# Altium PCB LineDetector.PcbDoc
Units mm, origin at the board's own origin, x right, y up, seen from the top; angles counter-clockwise.
Board outline 37 x 50 mm, 2 copper layers (Top Layer, Bottom Layer); 43 components, 24 nets, 141 pads, 30 vias.
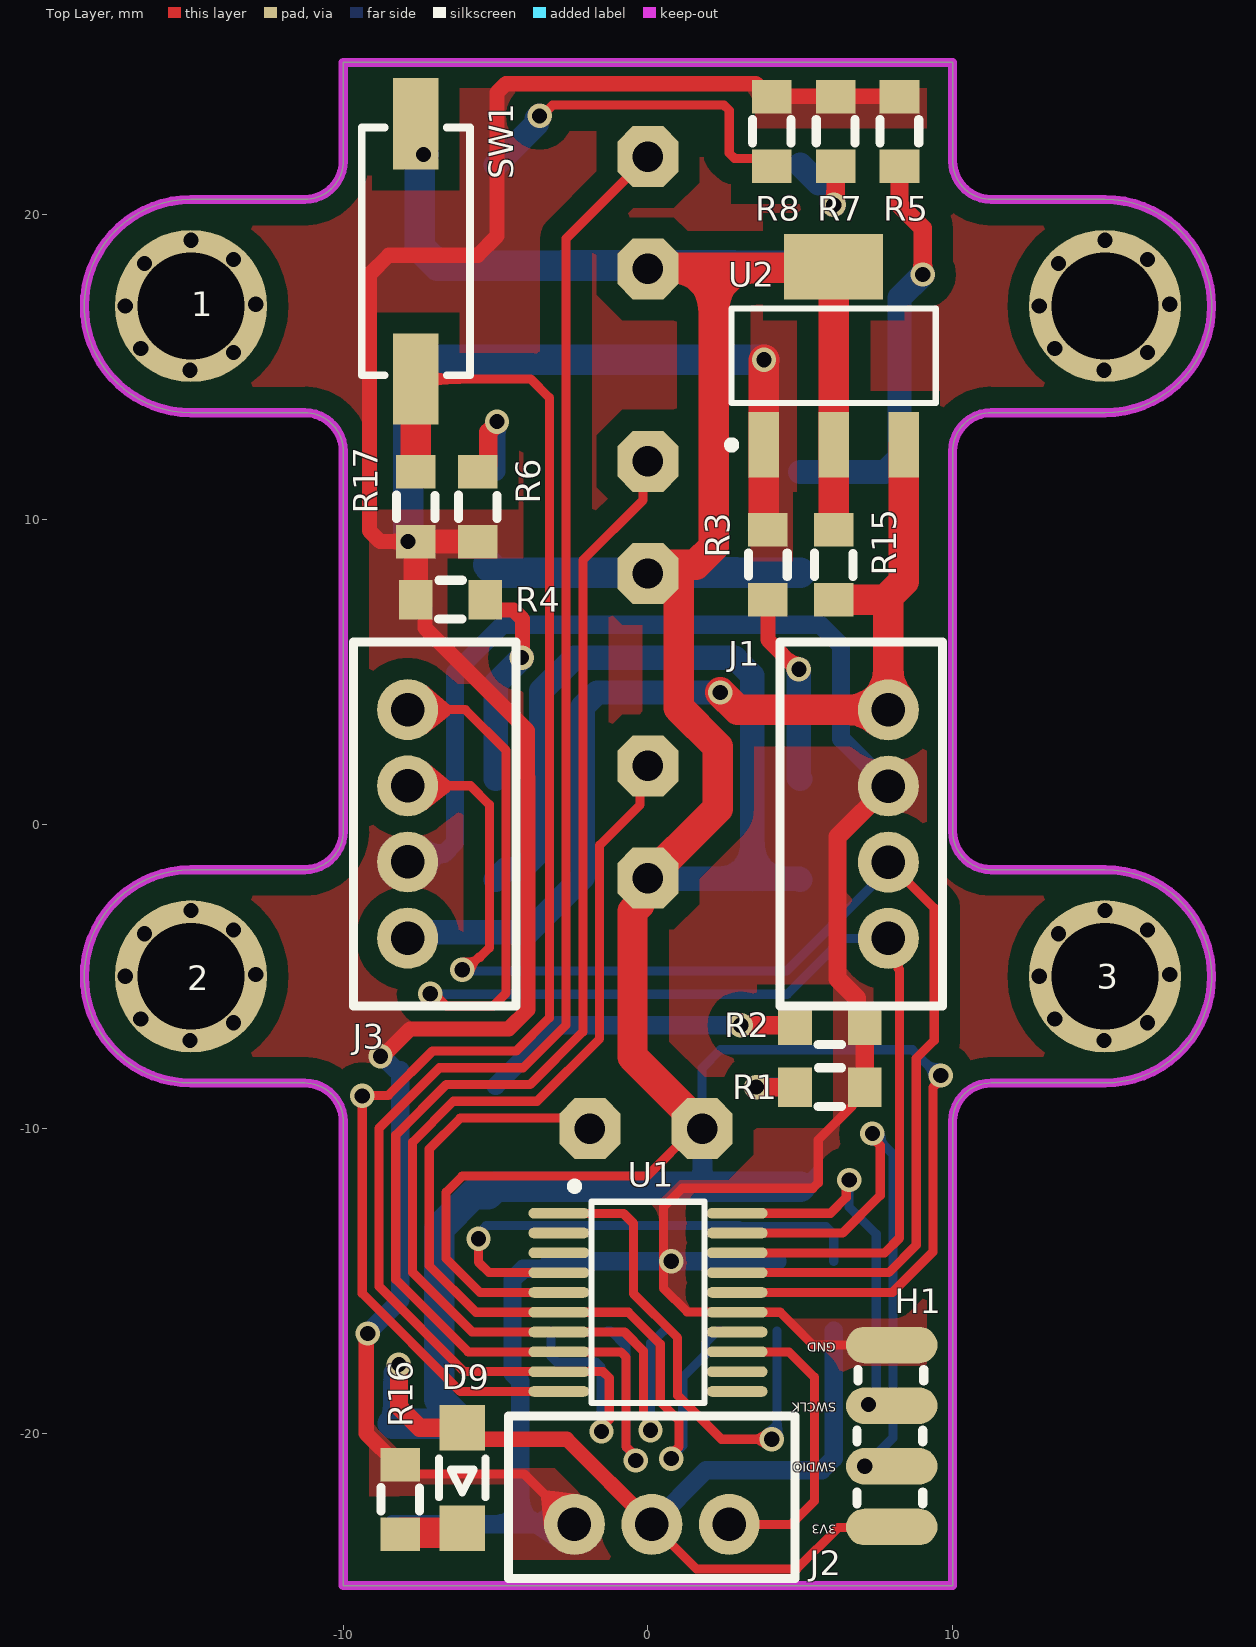
[diagram p0: Top Layer view]
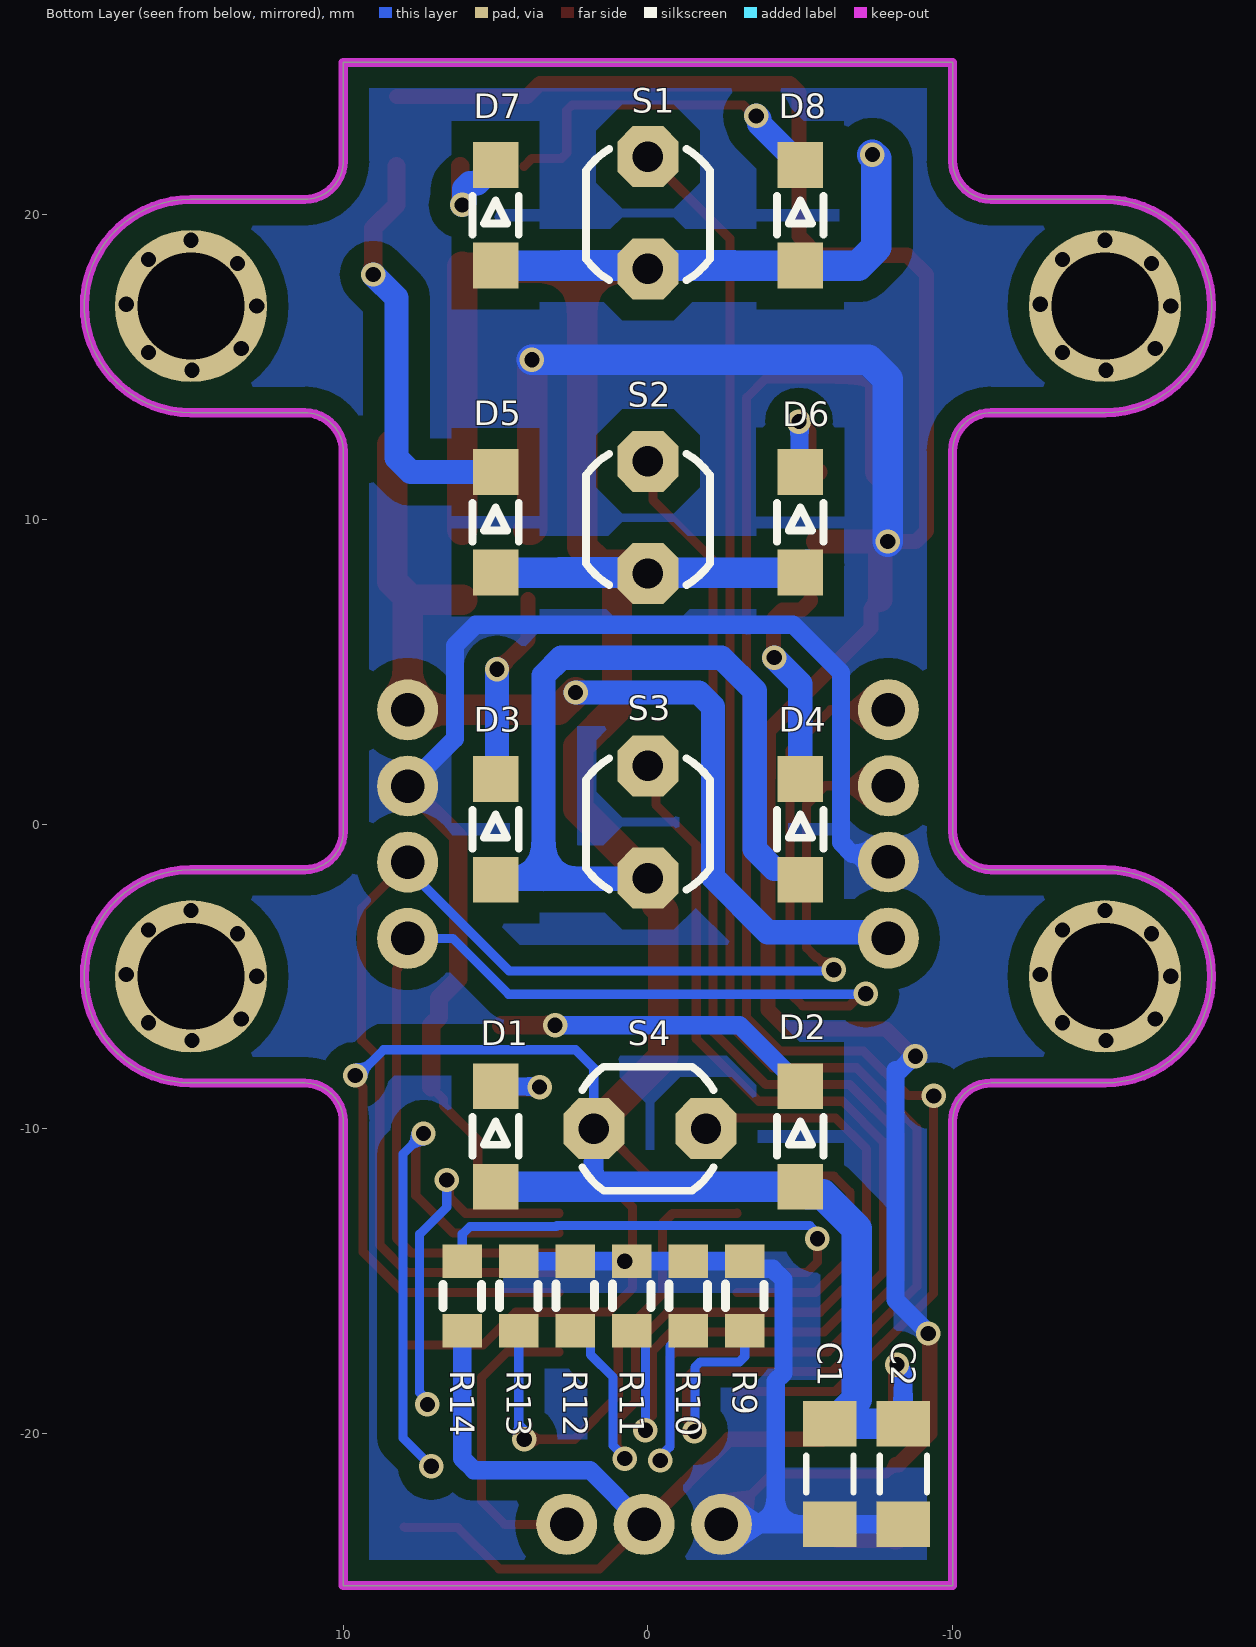
[diagram p1: Bottom Layer view, seen from below]
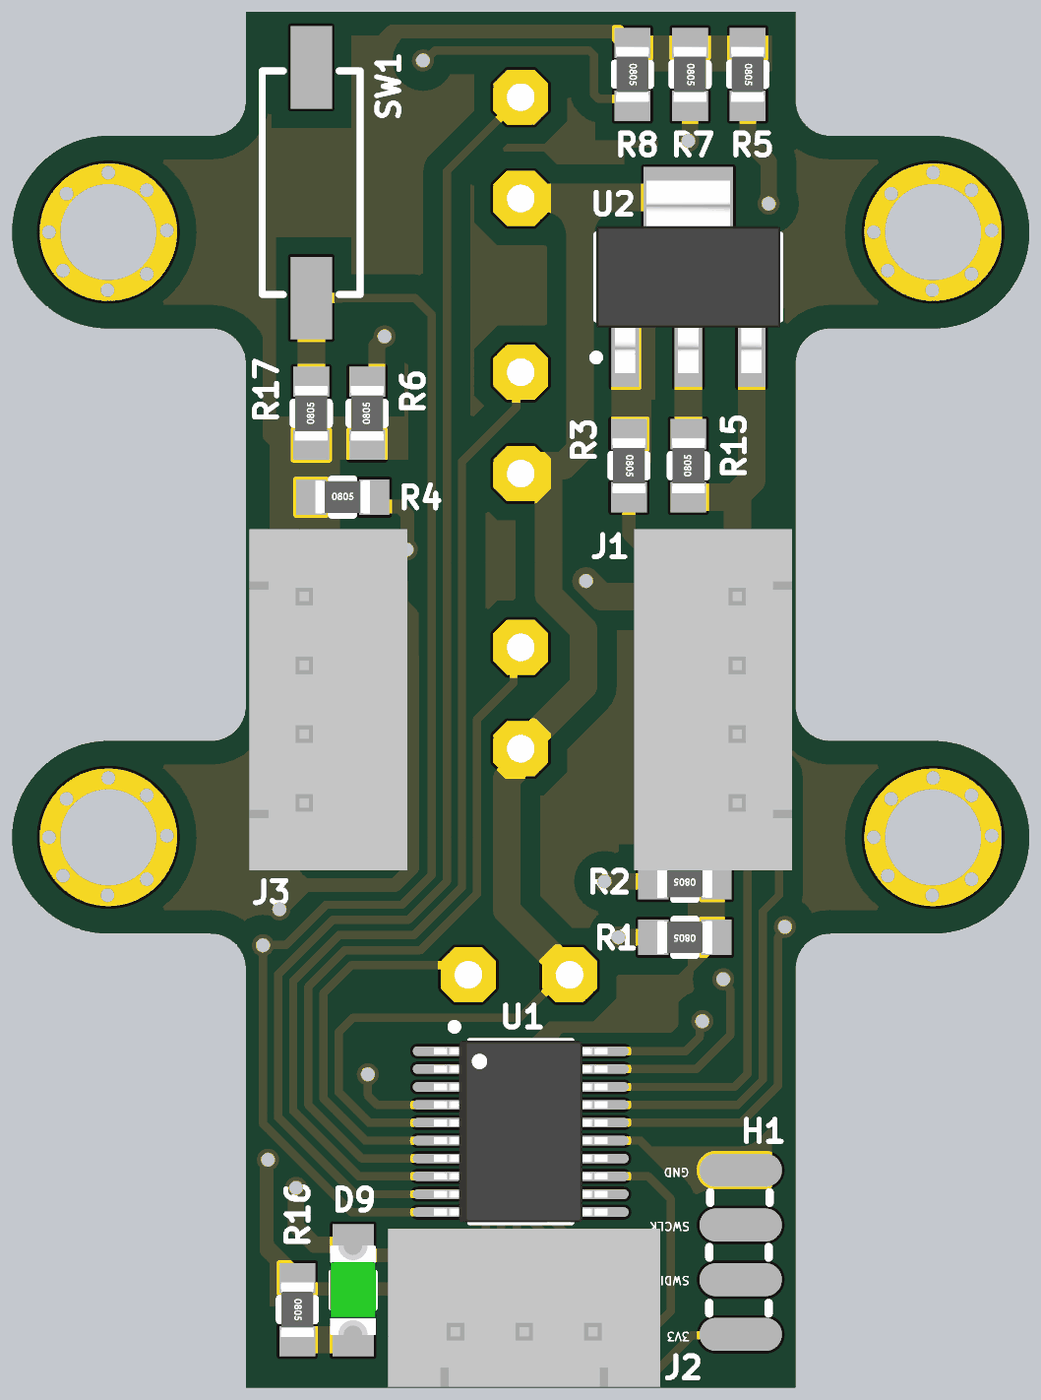
[diagram p2: 3D render of the assembled board from above, using the file's embedded part models]
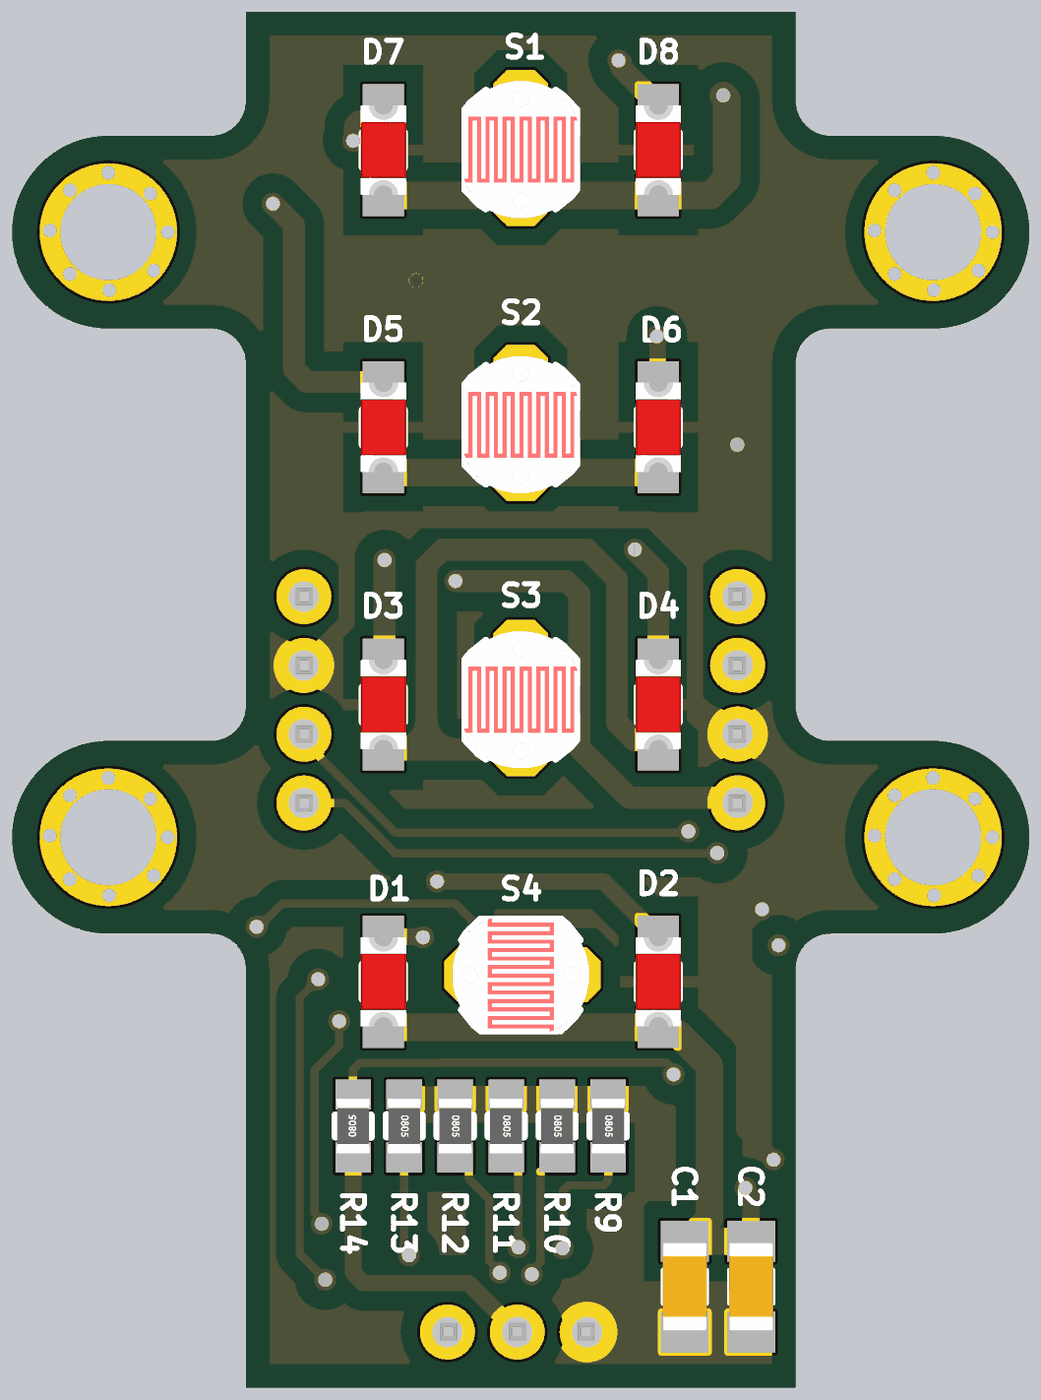
[diagram p3: 3D render of the assembled board from below, using the file's embedded part models]

## Layer stack, top to bottom
Top Solder: solder mask 0.0102, Solder Resist, Dk 3.5
Top Layer: signal copper 0.0356
Dielectric 1: dielectric 0.32, FR-4, Dk 4.8
Bottom Layer: signal copper 0.0356
Bottom Solder: solder mask 0.0102, Solder Resist, Dk 3.5

## Board outline
-15,-8.5 -11.27,-8.5 cw(c-11.27,-9.77) -10,-9.77 -10,-25 10,-25 10,-9.77 cw(c11.27,-9.77) 11.27,-8.5 15,-8.5 ccw(c15,-5) 15,-1.5 11.27,-1.5 cw(c11.27,-0.23) 10,-0.23 10,12.23 cw(c11.27,12.23) 11.27,13.5 15,13.5 ccw(c15,17) 15,20.5 11.27,20.5 cw(c11.27,21.77) 10,21.77 10,25 -10,25 -10,21.77 cw(c-11.27,21.77) -11.27,20.5 -15,20.5 ccw(c-15,17) -15,13.5 -11.27,13.5 cw(c-11.27,12.23) -10,12.23 -10,-0.23 cw(c-11.27,-0.23) -11.27,-1.5 -15,-1.5 ccw(c-15,-5)

## Design rules (kind name [scope] priority, off if disabled: settings)
Clearance [All] p1: gap=0.7 ignorepadtopadclearanceinfootprint=FALSE except(0: Arc-Hole Track-Hole SMDPad-Hole THPad-Hole Via-Hole Fill-Hole Poly-Hole Region-Hole Text-Hole; 0.25: Arc-Arc Arc-Track Arc-SMDPad Track-Track Track-SMDPad SMDPad-SMDPad; 0.254: Arc-THPad Arc-Via Arc-Text Track-THPad Track-Via Track-Text SMDPad-THPad SMDPad-Via SMDPad-Text THPad-THPad THPad-Via THPad-Text Via-Via Via-Text Fill-Text Poly-Text Region-Text Text-Text)
ComponentClearance [All] p1 off: gap=0.254 collisioncheckmode=3 verticalgap=0.254 showdistances=FALSE
Height [All] p1 off: minheight=0 maxheight=25.4 prefheight=12.7
PlaneConnect [All] p1: planeconnectstyle=Direct reliefexpansion=0.508 reliefentries=4 reliefconductorwidth=0.254 reliefairgap=0.254
PolygonConnect [All] p1: connectstyle=Direct reliefconductorwidth=0.254 reliefentries=4 polygonreliefangle="90 Angle" airgapwidth=0.254
RoutingVias [All] p1: holewidth=0.5 width=0.8 viastyle="Through Hole" minholewidth=0.5 minwidth=0.5 maxholewidth=0.5 maxwidth=1
SolderMaskExpansion [All] p1: expansion=0.102 istentingtop=FALSE
Width [All] p1: maxlimit=5 minlimit=0.25 preferedwidth=1
27 further rules are at their usual default settings.

## Classes and differential pairs
component class LineDetector: C1 C2 D1 D2 D3 D4 D5 D6 D7 D8 D9 H1 J1 J2 J3 R1 R2 R3 R4 R5 R6 R7 R8 R9 R10 R11 R12 R13 R14 R15 R16 R17 S1 S2 S3 S4 SW1 U1 U2

## Components (designator, comment, footprint, x,y, rotation, side; value= is the part's Value field where it differs from the comment)
1 "Comment" SCREW -15,17 r0 top locked
2 "Comment" SCREW -15,-5 r0 top
3 "Comment" SCREW 15,-5 r0 top
C1 "CAP" CAP1206 -5.969,-21.336 r90 bottom
C2 "CAP" CAP1206 -8.382,-21.336 r90 bottom
D1 "LED" "LED RED 1206" 5,-10.254 r90 bottom locked
D2 "LED" "LED RED 1206" -5,-10.254 r90 bottom locked
D3 "LED" "LED RED 1206" 5,-0.176 r90 bottom locked
D4 "LED" "LED RED 1206" -5,-0.176 r90 bottom locked
D5 "LED" "LED RED 1206" 5,9.903 r90 bottom locked
D6 "LED" "LED RED 1206" -5,9.903 r90 bottom locked
D7 "LED" "LED RED 1206" 5,19.981 r90 bottom locked
D8 "LED" "LED RED 1206" -5,19.981 r90 bottom locked
D9 "LED" "LED GREEN 1206" -6.096,-21.463 r270 top
H1 "PROG" PROGRAMER 8.001,-20.024 r90 top
J1 "XH4" "XH 4PIN" 7,0 r90 top locked
J2 "XH3" "XH 3PIN" 0.127,-22.098 r0 top
J3 "XH4" "XH 4PIN" -7,0 r270 top locked
R1 "RES" RES805 5.969,-8.636 r180 top
R2 "RES" RES805 5.969,-6.604 r180 top
R3 "RES" RES805 3.937,8.509 r270 top
R4 "RES" RES805 -6.477,7.366 r0 top
R5 "RES" RES805 8.255,22.733 r270 top
R6 "RES" RES805 -5.588,10.414 r90 top
R7 "RES" RES805 6.159,22.733 r270 top
R8 "RES" RES805 4.064,22.733 r270 top
R9 "RES" RES805 -3.179,-15.494 r270 bottom
R10 "RES" RES805 -1.324,-15.494 r270 bottom
R11 "RES" RES805 0.531,-15.494 r270 bottom
R12 "RES" RES805 2.386,-15.494 r270 bottom
R13 "RES" RES805 4.241,-15.494 r270 bottom
R14 "RES" RES805 6.096,-15.494 r90 bottom
R15 "RES" RES805 6.096,8.509 r90 top
R16 "RES" RES805 -8.128,-22.171 r270 top
R17 "RES" RES805 -7.62,10.414 r90 top
S1 "LDR" LDR 0,20 r90 bottom locked
S2 "LDR" LDR 0,10 r90 bottom locked
S3 "LDR" LDR 0,0 r90 bottom
S4 "LDR" LDR 0,-10 r180 bottom locked
SW1 "Switch" pushbutton -7.62,18.796 r270 top
U1 "STM32F030F4P6" STM32F030F4P6 0,-15.7 r0 top locked
U2 "1117" AMS1117 6.096,15.367 r90 top
? "Comment" SCREW 15,17 r0 top locked

## Footprints (in the part's own frame and the unit in brackets; to place one, negate y for a bottom-side part, rotate by r counter-clockwise, add the part's x,y. Pads: shape width x height; smd on the part's side, far side on the other; paste and mask are expansions set on the pad)
AMS1117 [mm] "SOT223, 4-Leads, Body 6.30x7.00mm (avg), Pitch 2.30mm, IPC Medium Density"
  rect 2.15x1 smd: 1(-2.925,2.3) 2(-2.925,0) 3(-2.925,-2.3)
  rect 2.15x3.25 smd: 4(2.925,0)
  silkscreen extent -3.05,-3.35 1.55,3.47, body extent -3.5,-3.35 3.5,3.35, height 1.65
CAP1206 [mm] "Chip Capacitor, 2-Leads, Body 3.20x1.60mm, IPC Medium Density"
  rect 1.5x1.75 smd: 1(-1.651,0) 2(1.651,0)
  silkscreen extent -0.6,-0.77 0.6,0.77, body extent -1.6,-0.8 1.6,0.8, height 1
LDR [mm]
  oct 2x2 hole 1: 1(-1.778,0) 2(1.905,0)
  silkscreen extent -2.15,-2.03 2.15,2.03, body extent -2.5,-2.15 2.5,2.15, height 2.9
"LED GREEN 1206" [mm]
  rect 1.5x1.5 smd: 1(-1.651,0) 2(1.651,0)
  silkscreen extent -0.64,-0.76 0.64,0.76, body extent -1.63,-0.83 1.64,0.82, height 0.9
"LED RED 1206" [mm]
  rect 1.5x1.5 smd: 1(-1.651,0) 2(1.651,0)
  silkscreen extent -0.64,-0.76 0.64,0.76, body extent -1.63,-0.83 1.64,0.82, height 0.9
PROGRAMER [mm]
  oval 1.2x3 smd: 1(-3.048,0) 2(-1.058,0) 3(0.931,0) 4(2.921,0)
  silkscreen extent -2.29,-1.05 2.12,1.14
pushbutton [mm]
  rect 3x1.5 smd: 1(-4.191,0) 2(4.191,0)
  silkscreen extent -4.06,-1.78 4.06,1.78, body extent -4.17,-1.82 4.17,1.82, height 4.25
RES805 [mm]
  rect 1.1x1.3 smd: 1(-1.143,0) 2(1.143,0)
  silkscreen extent -0.39,-0.64 0.38,0.64, body extent -1,-0.6 1,0.6, height 0.48
SCREW [mm]
  round 5 hole 3.5: 1(0,0)
  round 0 hole 0.5: ""(-2.159,0) ""(-1.651,-1.397) ""(-1.524,1.397) ""(-0.031,-2.11) ""(0,2.159) ""(1.397,-1.524) ""(1.397,1.524) ""(2.128,0.059)
STM32F030F4P6 [mm] "TSOP, 20-Leads, Body 6.50x4.40mm, Pitch 0.65mm, IPC Medium Density"
  oval 2x0.35 smd: 1(-2.925,2.925) 2(-2.925,2.275) 3(-2.925,1.625) 4(-2.925,0.975) 5(-2.925,0.325) 6(-2.925,-0.325) 7(-2.925,-0.975) 8(-2.925,-1.625) 9(-2.925,-2.275) 10(-2.925,-2.925) 11(2.925,-2.925) 12(2.925,-2.275) 13(2.925,-1.625) 14(2.925,-0.975) 15(2.925,-0.325) 16(2.925,0.325) 17(2.925,0.975) 18(2.925,1.625) 19(2.925,2.275) 20(2.925,2.925)
  silkscreen extent -2.54,-3.3 1.85,3.93, body extent -3.15,-3.3 3.15,3.3, height 1.2
"XH 3PIN" [mm]
  round 2 hole 1.1: 1(-2.54,-0.889) 2(0,-0.889) 3(2.54,-0.889)
  silkscreen extent -4.7,-2.67 4.7,2.67, body extent -4.95,-2.88 4.95,2.88, height 7
"XH 4PIN" [mm]
  round 2 hole 1.1: 1(-3.753,-0.889) 2(-1.253,-0.889) 3(1.247,-0.889) 4(3.747,-0.889)
  silkscreen extent -5.97,-2.67 5.97,2.67, body extent -6.2,-2.88 6.2,2.88, height 7

## Part data
C1 C2: library part CAP1206, "Capacitor SMD 1206"
D1 D2 D3 D4 D5 D6 D7 D8 D9: library part "LED SMD 1206", "LED SMD 1206"
H1: library part Programmer
J1 J3: library part "XH 4PIN", "XH Connector 4pins"
J2: library part "XH 3PIN", "XH Connector 3pins"
R1 R2 R3 R4 R5 R6 R7 R8 R9 R10 R11 R12 R13 R14 R15 R16 R17: library part RES805, "RESISTOR SMD"
S1 S2 S3 S4: "Light Emmiting Diode - photocell"
SW1: library part pushbutton, "Switch SMD Tact"
U2: library part AMS1117, "3.3v Regulator"

## Via types
v1: diameter 0.8, hole 0.5, Top Layer to Bottom Layer, tented both sides, 30 vias

## Nets (pads, with @x,y where several pads share a name; then routed paths per layer and width w, separated by ;. In a path a pad name is that pad's centre, name@x,y a point inside that pad or via, vN(x,y) a via of type N, cw(c..) or ccw(c..) an arc to the next point about the centre after c; other vN are vias at no path point)
+5: J1.4 J3.4 R15.1 U2.3 | length 33.4
  Top Layer w1: v1(2.375,4.318) 2.946,3.747 J1.4 7.889,7.459 ; R15.1 7.796,7.366 7.889,7.459 ; U2.3 8.396,7.966 7.889,7.459
  Bottom Layer w0.8: J3.4 -7.698,-3.555 -3.936,-3.555 -2.134,-1.753 -2.134,3.849 -1.666,4.318 v1(2.375,4.318)
ADC0: R12.2 S4.2 U1.6 | length 27.3
  Top Layer w0.3: S4.2 -2.253,-9.652 -6.16,-9.652 -7.177,-10.669 -7.177,-14.493 -5.645,-16.025 U1.6 -0.644,-16.025 0.404,-17.073 0.404,-18.962 1.016,-19.574 1.016,-20.439 0.762,-20.693 v1(0.762,-20.828)
  Bottom Layer w0.3: v1(0.762,-20.828) 0.762,-20.783 1.143,-20.402 1.143,-18.161 1.886,-17.418 1.886,-17.037 2.286,-16.637 R12.2
ADC1: R11.2 S3.2 U1.7 | length 36.3
  Top Layer w0.3: S3.2 -0.258,1.647 -0.258,0.631 -1.587,-0.698 -1.587,-6.286 -1.587,-7.048 -3.641,-9.102 -4.403,-9.102 -5.704,-9.102 -6.388,-9.102 -7.727,-10.441 -7.727,-14.721 -5.772,-16.675 U1.7 -0.771,-16.675 -0.146,-17.3 -0.146,-19.412 -0.011,-19.547 -0.011,-19.804 v1(0.085,-19.9)
  Bottom Layer w0.3: v1(0.085,-19.9) 0.085,-17.037 0.118,-17.037 0.518,-16.637 R11.2
ADC2: R10.2 S2.2 U1.8 | length 48.7
  Top Layer w0.3: v1(-0.404,-20.89) -0.404,-20.754 -0.719,-20.439 -0.719,-17.505 -0.899,-17.325 U1.8 -5.9,-17.325 -8.277,-14.949 -8.277,-10.213 -6.615,-8.552 -5.932,-8.552 -4.631,-8.552 -3.869,-8.552 -2.137,-6.82 -2.137,-6.058 -2.137,8.658 -0.164,10.631 -0.164,11.741 S2.2
  Bottom Layer w0.3: R10.2 -1.224,-16.637 -0.72,-17.141 -0.72,-20.438 -0.404,-20.754 v1(-0.404,-20.89)
ADC3: R9.2 S1.2 U1.9 | length 57.8
  Top Layer w0.3: v1(-1.524,-19.939) -1.524,-19.804 -1.269,-19.549 -1.269,-18.181 -1.475,-17.975 U1.9 -6.028,-17.975 -8.827,-15.176 -8.827,-9.985 -6.843,-8.002 -6.16,-8.002 -4.859,-8.002 -4.097,-8.002 -2.687,-6.592 -2.687,-5.83 -2.687,19.218 S1.2
  Bottom Layer w0.3: R9.2 -3.179,-17.477 -3.003,-17.653 -1.716,-17.653 -1.54,-17.829 -1.54,-19.923 v1(-1.524,-19.939)
BOOT0: R13.2 U1.1 | length 16.1
  Top Layer w0.3: U1.1 -2.915,-12.785 -0.804,-12.785 -0.476,-13.113 -0.476,-15.415 0.975,-16.866 0.975,-18.755 2.413,-20.193 v1(4.064,-20.193)
  Bottom Layer w0.3: v1(4.064,-20.193) 4.064,-20.058 4.241,-19.881 R13.2
DOUT: J2.3 U1.13 | length 10.1
  Top Layer w0.3: J2.3 4.699,-22.987 5.461,-22.225 5.461,-18.161 4.625,-17.325 U1.13
GND: C1.1 C2.1 H1.4 J1.3 J2.1 J3.3 R1.1 R2.1 R3.1 R4.1 R5.1 R6.1 R7.1 R8.1 R9.1 R10.1 R11.1 R12.1 R13.1 R16.1 R17.1 U1.15 U2.1 | length 182.1
  Top Layer w0.3: R16.1 -7.82,-21.336 -4.064,-21.336 J2.1 ; v1(0.762,-14.351) v1@0.508,-14.351 ; R1.1 6.712,-9.036 6.712,-9.245 5.588,-10.369 5.588,-11.778 5.412,-11.954 1.127,-11.954 0.508,-12.573 v1@0.508,-14.351 ; H1.4 5.419,-17.103 4.341,-16.025 U1.15 2.915,-16.015 1.283,-16.015 0.508,-15.24 v1@0.508,-14.351
  Top Layer w0.5: v1(-9.196,-16.722) -9.25,-16.775 -9.25,-20.006 -8.228,-21.028 R16.1 ; v1(-8.778,-7.62) -8.697,-7.62 -7.808,-6.731 -4.572,-6.731 -3.937,-6.096 -3.937,1.524 -3.957,1.544 -3.957,3.068 -7.32,6.431 -7.32,7.066 R4.1 ; v1(-7.874,9.271) -8.793,9.271 -9.144,9.622 -9.144,18.034 -8.509,18.669 -5.588,18.669 -4.953,19.304 -4.953,24.007 -4.66,24.3 3.54,24.3 3.964,23.876 R8.1 R7.1 R5.1
  Top Layer w0.6: R1.1 R2.1 6.862,-6.354 6.862,-5.719 6.223,-5.08 6.223,-0.419 J1.3
  Top Layer w0.8: R4.1 R17.1 R6.1
  Top Layer w1: v1(3.81,15.24) 3.796,15.226 U2.1 3.796,9.702 3.846,9.652 R3.1
  Bottom Layer w0.6: v1(-9.196,-16.722) -9.196,-16.689 -8.128,-15.621 -8.128,-8.071 -8.272,-8.071 -8.724,-7.62 v1(-8.778,-7.62) ; C2.1 C1.1 -4.191,-22.987 ; J3.3 -7.621,-0.979 -6.703,-0.979 -6.335,-0.611 -6.335,4.968 -4.761,6.542 5.65,6.542 6.335,5.857 6.335,2.801 J1.3 ; J2.1 -4.191,-22.987 ; R13.1 R12.1 v1(0.762,-14.351) R11.1 R10.1 R9.1 -3.429,-14.601 -4.094,-14.601 -4.445,-14.952 -4.445,-18.034 -4.191,-18.288 -4.191,-22.987
  Bottom Layer w1: v1(-7.874,9.271) -7.874,14.605 -7.239,15.24 v1(3.81,15.24)
NetD1_2: D1.2 R1.2 | length 2.7
  Top Layer w0.6: v1(3.556,-8.636) R1.2
  Bottom Layer w0.6: v1(3.556,-8.636) 3.572,-8.62 4.984,-8.62 D1.2
NetD2_2: D2.2 R2.2 | length 10.7
  Top Layer w0.6: v1(3.048,-6.604) R2.2
  Bottom Layer w0.6: D2.2 -3.001,-6.604 v1(3.048,-6.604)
NetD3_2: D3.2 R3.2 | length 6.4
  Top Layer w0.5: R3.2 3.937,6.044 4.901,5.08 v1(4.953,5.08)
  Bottom Layer w0.8: v1(4.953,5.08) 4.953,1.522 D3.2
NetD4_2: D4.2 R4.2 | length 7.1
  Top Layer w0.5: R4.2 -5.334,7.325 -5.034,7.025 -4.414,7.025 -4.121,6.732 -4.121,5.488 v1(-4.148,5.461)
  Bottom Layer w0.8: D4.2 -5,4.609 v1(-4.148,5.461)
NetD5_2: D5.2 R5.2 | length 13.6
  Top Layer w0.6: R5.2 8.255,20.32 9.017,19.558 v1(9.017,18.034)
  Bottom Layer w0.8: D5.2 7.786,11.554 8.255,12.023 8.255,17.272 v1(9.017,18.034)
NetD6_2: D6.2 R6.2 | length 3.6
  Top Layer w0.6: R6.2 -5.488,11.557 -5.238,11.807 -5.238,12.869 -4.953,13.154 v1(-4.953,13.208)
  Bottom Layer w0.6: D6.2 -4.977,11.577 -4.977,13.184 v1(-4.953,13.208)
NetD7_2: D7.2 R7.2 | length 3.2
  Top Layer w0.6: v1(6.096,20.32) 6.159,20.383 R7.2
  Bottom Layer w0.8: D7.2 5.6,21.032 5.855,21.032 6.031,20.857 6.031,20.385 v1(6.096,20.32)
NetD8_2: D8.2 R8.2 | length 11.6
  Top Layer w0.3: v1(-3.556,23.241) -3.489,23.241 -3.13,23.6 2.491,23.6 2.667,23.424 2.667,22.02 2.843,21.844 3.81,21.844 R8.2
  Bottom Layer w0.8: D8.2 -3.652,22.981 -3.652,23.145 v1(-3.556,23.241)
NetD9_2: D9.2 R16.2 | length 2.1
  Top Layer w1: R16.2 -8.078,-23.264 -6.246,-23.264 D9.2
NRST: R14.2 U1.4 | length 16.5
  Top Layer w0.3: v1(-5.561,-13.616) -5.561,-14.378 -5.214,-14.725 U1.4
  Bottom Layer w0.3: v1(-5.561,-13.616) -5.561,-13.435 -5.31,-13.184 2.991,-13.184 3.012,-13.205 5.839,-13.205 6.096,-13.462 R14.2
SCL: J1.2 J3.2 U1.17 | length 44.1
  Top Layer w0.3: J3.2 -5.825,1.253 -5.207,0.635 -5.207,-4.064 -5.517,-4.374 -5.55,-4.374 -5.961,-4.784 v1(-6.096,-4.784) ; U1.17 7.897,-14.725 8.805,-13.817 8.805,-7.695 9.398,-7.102 9.398,-2.762 J1.2
  Bottom Layer w0.3: v1(-6.096,-4.784) -6.054,-4.826 4.556,-4.826 7.889,-1.493 J1.2
SDA: J1.1 J3.1 U1.18 | length 45.9
  Top Layer w0.3: J3.1 -5.999,3.753 -4.657,2.412 -4.657,-5.546 -5.08,-5.969 -6.615,-5.969 -7.011,-5.573 v1(-7.147,-5.573) ; U1.18 7.769,-14.075 8.255,-13.589 8.255,-4.779 8.214,-4.738 8.214,-4.078 J1.1
  Bottom Layer w0.3: v1(-7.147,-5.573) -7.132,-5.588 4.572,-5.588 6.407,-3.753 J1.1
SW1: R17.2 SW1.2 U1.10 | length 49.5
  Top Layer w0.3: v1(-9.377,-8.924) -9.377,-15.404 -6.156,-18.625 U1.10 ; v1@-9.377,-8.908 -8.527,-8.908 -7.071,-7.452 -4.324,-7.452 -3.237,-6.365 -3.237,13.99 -3.852,14.605 SW1.2
  Top Layer w1: R17.2 SW1.2
SWCLK: H1.3 U1.20 | length 12.2
  Top Layer w0.3: U1.20 5.99,-12.775 6.508,-12.257 6.508,-11.78 v1(6.604,-11.684)
  Bottom Layer w0.3: v1(6.604,-11.684) 6.604,-12.573 7.493,-13.462 7.493,-18.661 7.239,-18.915 v1(7.239,-19.05)
SWIO: H1.2 U1.19 | length 18.9
  Top Layer w0.3: U1.19 6.387,-13.425 7.624,-12.188 7.624,-10.553 7.366,-10.295 v1(7.366,-10.16)
  Bottom Layer w0.3: v1(7.112,-21.082) 8.043,-20.151 8.043,-10.837 v1(7.366,-10.16)
VCC: C1.2 C2.2 D1.1 D2.1 D3.1 D4.1 D5.1 D6.1 D7.1 D8.1 D9.1 H1.1 J2.2 R14.1 R15.2 S1.1 S2.1 S3.1 S4.1 SW1.1 U1.5 U1.16 U2.2 U2.4 | length 196.8
  Top Layer w0.3: U1.5 -5.517,-15.375 -6.627,-14.265 -6.627,-12.088 -6.096,-11.557 -0.032,-11.557 1.525,-10 S4.1 ; J2.2 1.59,-24.45 4.887,-24.45 6.241,-23.096 7.976,-23.096 H1.1 ; U1.16 8.025,-15.375 9.355,-14.045 9.355,-8.644 9.609,-8.39 v1(9.609,-8.255)
  Top Layer w0.5: D9.1 -5.715,-20.193 -2.667,-20.193 J2.2
  Top Layer w0.6: v1(-8.174,-17.744) -8.174,-19.131 -7.493,-19.812 D9.1
  Top Layer w1: S2.1 S2.1@0.762,8.222 ; S1.1 0.035,18.257 2.159,18.257 ; S2.1@0.762,8.515 1.573,8.515 2.159,9.101 2.159,18.257 ; 1.016,8.515 1.016,3.81 2.286,2.54 2.286,0.508 -0.293,-2.071 -0.293,-2.649 -0.508,-2.864 -0.508,-7.644 1.778,-9.93 S4.1 ; R15.2 U2.2 U2.4 6.061,18.257 2.159,18.257
  Bottom Layer w0.3: S4.1 1.778,-8.008 2.378,-7.408 8.678,-7.408 9.525,-8.255 v1(9.609,-8.255) ; D1.1 D1.1@5.545,-11.36
  Bottom Layer w0.6: C2.2 -8.382,-18.006 -8.174,-17.798 v1(-8.174,-17.744) ; J2.2 1.905,-21.209 5.715,-21.209 6.096,-20.828 R14.1 ; 1.778,-11.905 S4.1
  Bottom Layer w0.8: D4.1 -4.65,-1.477 -4.149,-1.477 -3.5,-0.828 -3.5,4.374 -2.413,5.461 2.843,5.461 3.429,4.875 3.429,-1.802 ; S3.1 0.024,-1.802 3.429,-1.802 ; D3.1 4.976,-1.802 3.429,-1.802
  Bottom Layer w1: C2.2 C1.2 -6.057,-19.685 -6.858,-18.884 -6.858,-13.282 -5.731,-12.155 -5.25,-12.155 D2.1 1.778,-11.905 D1.1 ; v1(-7.366,21.971) -7.493,21.844 -7.493,18.923 -6.9,18.33 D7.1 ; D6.1@-5.25,8.502 D6.1 D5.1
pads on no net: 1. 1.1 2. 2.1 3. 3.1 ?. ?.1 U1.2 U1.3 U1.11 U1.12 U1.14

## Polygon pours and split planes (outlines as drawn)
GND on Top Layer "GND_L01_P002" (solid, pour order 2): -15,-8.5 -11.27,-8.5 cw(c-11.27,-9.77) -10,-9.77 -10,-25 10,-25 10,-9.77 cw(c11.27,-9.77) 11.27,-8.5 15,-8.5 ccw(c15,-5) 15,-1.5 11.27,-1.5 cw(c11.27,-0.23) 10,-0.23 10,12.23 cw(c11.27,12.23) 11.27,13.5 15,13.5 ccw(c15,17) 15,20.5 11.27,20.5 cw(c11.27,21.77) 10,21.77 10,25 -10,25 -10,21.77 cw(c-11.27,21.77) -11.27,20.5 -15,20.5 ccw(c-15,17) -15,13.5 -11.27,13.5 cw(c-11.27,12.23) -10,12.23 -10,-0.23 cw(c-11.27,-0.23) -11.27,-1.5 -15,-1.5 ccw(c-15,-5)
GND on Bottom Layer "GND_L02_P003" (solid, pour order 3): -15,-8.5 -11.27,-8.5 cw(c-11.27,-9.77) -10,-9.77 -10,-25 10,-25 10,-9.77 cw(c11.27,-9.77) 11.27,-8.5 15,-8.5 ccw(c15,-5) 15,-1.5 11.27,-1.5 cw(c11.27,-0.23) 10,-0.23 10,12.23 cw(c11.27,12.23) 11.27,13.5 15,13.5 ccw(c15,17) 15,20.5 11.27,20.5 cw(c11.27,21.77) 10,21.77 10,25 -10,25 -10,21.77 cw(c-11.27,21.77) -11.27,20.5 -15,20.5 ccw(c-15,17) -15,13.5 -11.27,13.5 cw(c-11.27,12.23) -10,12.23 -10,-0.23 cw(c-11.27,-0.23) -11.27,-1.5 -15,-1.5 ccw(c-15,-5)

## Keep-outs
Keep-Out Layer:
  lines w0.3: -15,-8.5 cw(c-15,-5) -15,-1.5 -11.27,-1.5 ccw(c-11.27,-0.23) -10,-0.23 -10,12.23 ccw(c-11.27,12.23) -11.27,13.5 -15,13.5 cw(c-15,17) -15,20.5 -11.27,20.5 ccw(c-11.27,21.77) -10,21.77 -10,25 10,25 10,21.77 ccw(c11.27,21.77) 11.27,20.5 15,20.5 cw(c15,17) 15,13.5 11.27,13.5 ccw(c11.27,12.23) 10,12.23 10,-0.23 ccw(c11.27,-0.23) 11.27,-1.5 15,-1.5 cw(c15,-5) 15,-8.5 11.27,-8.5 ccw(c11.27,-9.77) 10,-9.77 10,-14.77 10,-25 -10,-25 -10,-9.77 ccw(c-11.27,-9.77) -11.27,-8.5 -15,-8.5

## Text inside footprints (layer, text, board x,y; h text height)
H1: Top Overlay "GND" at 6.156,-17.027 h0.3 r180; Top Overlay "SWCLK" at 6.182,-18.994 h0.3 r180; Top Overlay "SWDIO" at 6.173,-20.963 h0.3 r180; Top Overlay "3V3" at 6.173,-22.995 h0.3 r180